# Altium PCB PCB1.PcbDoc
Units mm, origin at the board's own origin, x right, y up, seen from the top; angles counter-clockwise.
Board outline 68 x 20 mm, 2 copper layers (Top Layer, Bottom Layer); 9 components, 5 nets, 24 pads, 46 vias.
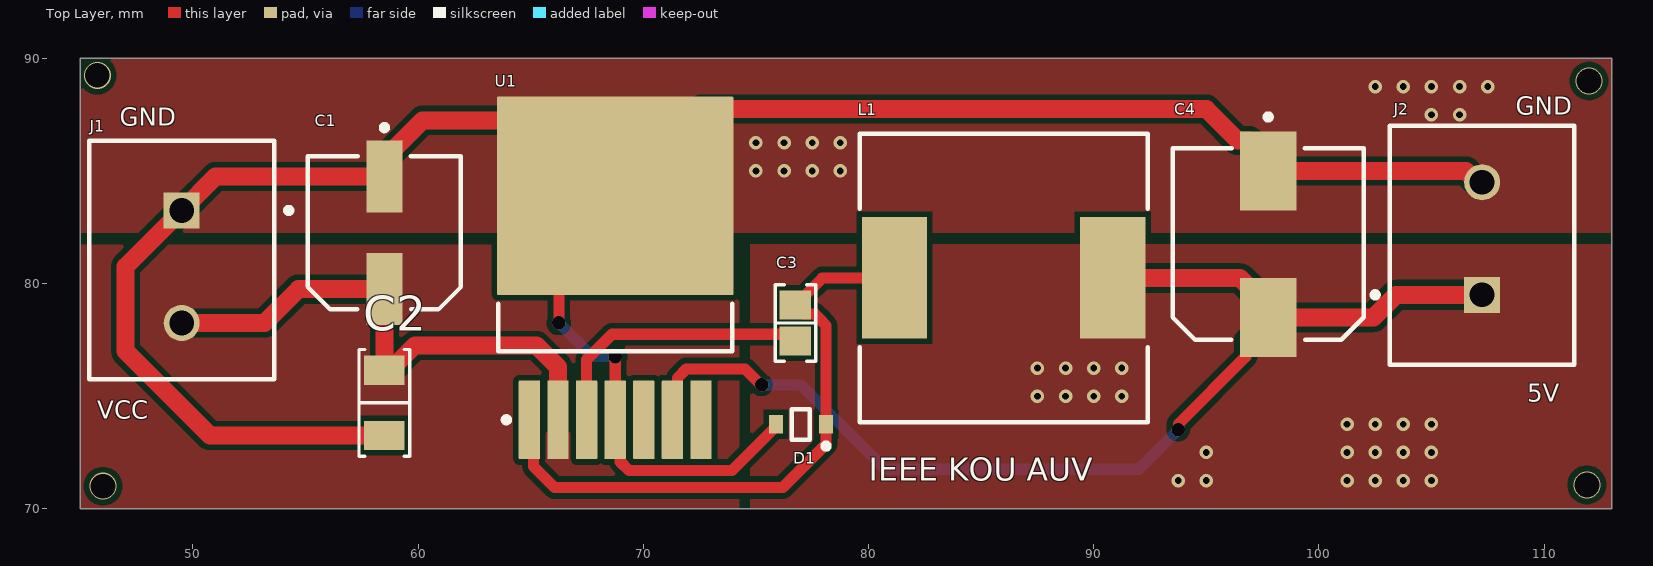
[diagram p0: Top Layer view]
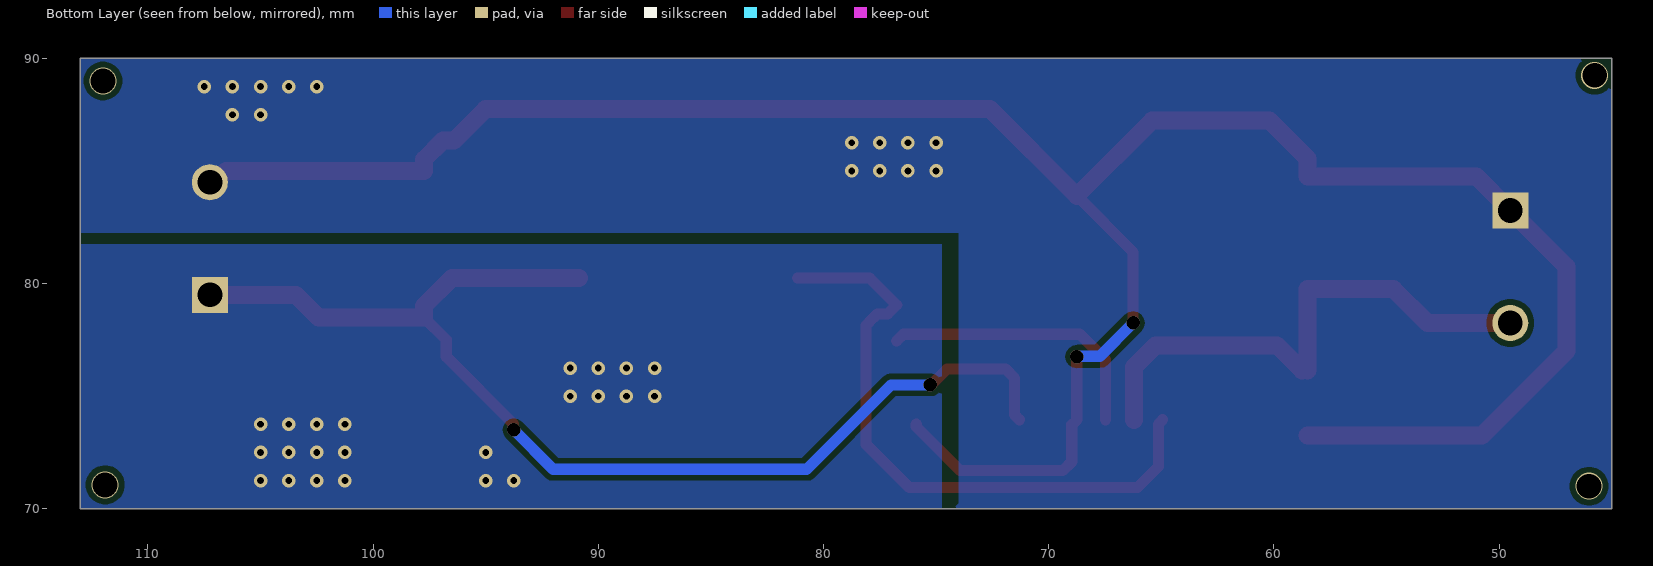
[diagram p1: Bottom Layer view, seen from below]
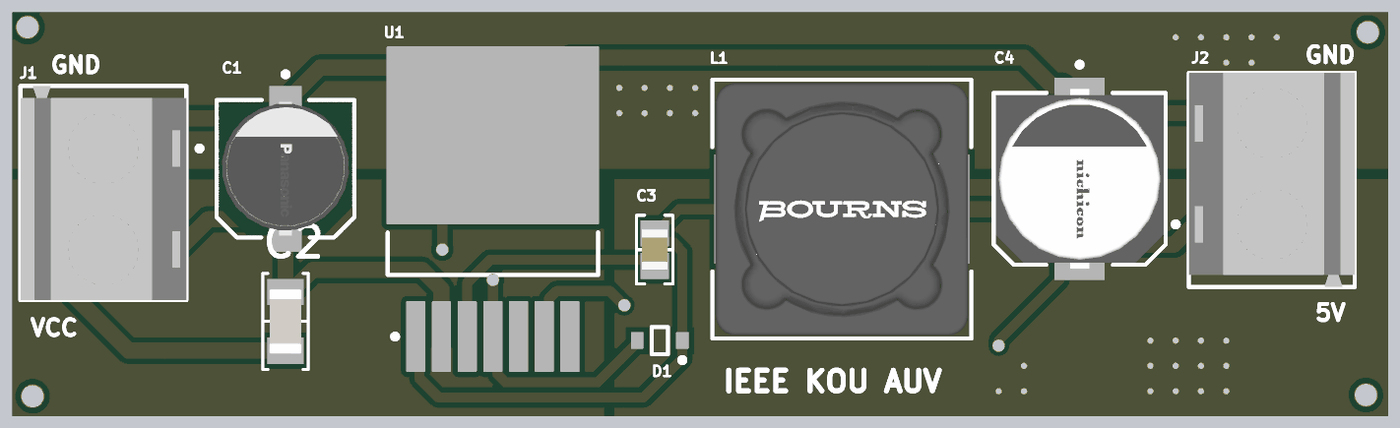
[diagram p2: 3D render of the assembled board from above, using the file's embedded part models]

## Layer stack, top to bottom
Top Solder: solder mask 0.0102, Solder Resist, Dk 3.5
Top Layer: signal copper 0.0356
Dielectric 1: dielectric 0.32, FR-4, Dk 4.8
Bottom Layer: signal copper 0.0356
Bottom Solder: solder mask 0.0102, Solder Resist, Dk 3.5

## Board outline
45,70 45,90 113,90 113,70

## Design rules (kind name [scope] priority, off if disabled: settings)
Clearance [All] p1: gap=0.254 ignorepadtopadclearanceinfootprint=FALSE except(0: Arc-Hole Track-Hole SMDPad-Hole THPad-Hole Via-Hole Fill-Hole Poly-Hole Region-Hole Text-Hole)
PolygonConnect [All] p1: connectstyle=Direct reliefconductorwidth=0.254 reliefentries=4 polygonreliefangle="90 Angle" airgapwidth=0.254
RoutingVias [All] p1: holewidth=0.6 width=0.6 viastyle="Through Hole" minholewidth=0.3 minwidth=0.3 maxholewidth=0.9 maxwidth=1.27
SolderMaskExpansion SolderMaskExpansion_2 [IsVia] p1: expansion=0.102 istentingtop=TRUE
Width [All] p1: maxlimit=2 minlimit=0.254 preferedwidth=0.5 minimp=50.000000 maximp=50.000000 favimp=50.000000
30 further rules are at their usual default settings.

## Classes and differential pairs
component class Sheet1: D1 J1 J2 L1 U1

## Components (designator, comment, footprint, x,y, rotation, side; value= is the part's Value field where it differs from the comment)
C1 "33 uF" FP-FK-D-MFG 58.5,82.25 r270 top value=47uF
C2 "0.47 µF" "CAP 1206_3216 - 0.8MM" 58.5,74.7 r90 top
C3 "10 nF" "CAP 0805_2012" 76.75,78.25 r90 top
C4 "220uF" FP-UWT1H101MNL1GS-MFG 97.75,81.75 r270 top
D1 "SK54" ONSC-SOD-323-2-477-02_V 77,73.75 r180 top
J1 "282836-2" TECO-282836-2_V 49.5,80.75 r270 top
J2 "282836-2" TECO-282836-2_V 107.25,82 r90 top
L1 "22 uH" FP-SRR1260-MFG 86,80.25 r0 top
U1 "LM2678S-5.0" KTW0007B_N 68.75,80.25 r90 top

## Footprints (in the part's own frame and the unit in brackets; to place one, negate y for a bottom-side part, rotate by r counter-clockwise, add the part's x,y. Pads: shape width x height; smd on the part's side, far side on the other; paste and mask are expansions set on the pad)
"CAP 0805_2012" [mm] "Chip Capacitor, 2-Leads, Body 2.00x1.20mm, IPC Medium Density"
  rect 1.3x1.4 smd: 1(-0.8,0) 2(0.8,0)
  silkscreen extent -1.7,-0.9 1.7,0.9, body extent -1,-0.64 1,0.64, height 1.26
"CAP 1206_3216 - 0.8MM" [mm] "Chip Capacitor, 2-Leads, Body 3.25x1.60mm, IPC Medium Density"
  rect 1.3x1.8 smd: 1(-1.45,0) 2(1.45,0)
  silkscreen extent -2.37,-1.12 2.37,1.12, body extent -1.6,-0.8 1.6,0.8, height 0.8
FP-FK-D-MFG [mm]
  rect 3.2x1.6 smd paste+0 mask+0: 1(-2.5,0) 2(2.5,0)
  silkscreen extent -4.8,-3.4 3.4,3.4, body extent -4.2,-3.5 4.2,3.5, height 0.25
FP-SRR1260-MFG [mm]
  rect 2.9x5.4 smd paste+0 mask+0: 1(-4.85,0) 2(4.85,0)
  silkscreen extent -6.4,-6.4 6.4,6.4, body extent -6.5,-6.5 6.5,6.5, height 0.25
FP-UWT1H101MNL1GS-MFG [mm]
  rect 3.5x2.5 smd paste+0 mask+0: 1(-3.25,0) 2(3.25,0)
  silkscreen extent -5.77,-4.25 4.25,4.25, body extent -5.25,-4.5 5.25,4.5, height 0.25
KTW0007B_N [mm] "DPAK, 7-Leads, Body 9.4x10.4mm, Pitch 1.27mm, IPC Medium Density"
  rrect11% 3.5x0.95 smd: 1(-6.3,3.81) 2(-6.3,2.54) 3(-6.3,1.27) 4(-6.3,0) 5(-6.3,-1.27) 6(-6.3,-2.54) 7(-6.3,-3.81)
  rrect1% 8.8x10.5 smd: 8(3.65,0)
  silkscreen extent -6.42,-5.2 -1.15,5.2, body extent -3.25,-5.2 6.15,5.2, height 4.65
ONSC-SOD-323-2-477-02_V [mm] "SOD, 2-Leads, Body 1.7x1.25mm"
  rect 0.63x0.83 smd: 1(-1.115,0) 2(1.115,0)
  silkscreen extent -1.24,-0.67 0.4,1.09, body extent -0.85,-0.63 0.85,0.63, height 1.06
TECO-282836-2_V [mm] "Female Header, Pitch 5mm, 1 x 2 Position, Height 10mm"
  rect 1.6x1.6 hole 1.1: 1(-2.5,0)
  round 1.6 hole 1.1: 2(2.5,0)
  silkscreen extent -5.6,-4.1 5,4.88, body extent -5.6,-4.1 5,4.1, height 10

## Part data
C1: library part CMP-05427-000002-1, "CAP ALUM 47UF 20% 35V SMD", Capacitance=47uF, Leakage Current=16.45uA, manufacturer=Panasonic, Manufacturer Part Number=EEE-FK1V470P, Package=FK-D, Ripple Current=240mA, Temperature="-55°C to +105°C", Temperature Range High=+105°C, Temperature Range Low=-55°C, Tolerance=20%, Voltage Rating=35V, Automotive=Yes, Automotive Grade="Grade 2", Category=Cap, componentlink2description=Datasheet, componentlink2url=https://industrial.panasonic.com/cdbs/www-data/pdf/RDE0000/ABA0000C1181.pdf, Device Class L1="Passive Components", Device Class L2=Capacitors, Device Class L3="Aluminum Electrolytic Capacitors", Digikey Description="CAP ALUM 47UF 20% 35V SMD", Dissipation Factor=12%, Esr=0.36Ω, Height=6.1mm, Lead Free=Yes, Life=2000Hours, Material=Aluminum, Mouser Description="Capacitor Aluminum Electrolytic 47uF 35 Volt 20% (6.3 X 5.8mm) Surface Mount 240mA 2000h 105C Automotive", Octopart=https://octopart.com/eeefk1v470p-panasonic-4642848, RoHS=TRUE
C2: library part CL31B474KBHNNNE, "CAP CER 0.47UF 50V X7R 1206", Device Package="1206 (3216 Metric)", manufacturer="Samsung Electro-Mechanics", Operating Temperature="-55°C ~ 125°C", Supplier Part Number 1=1276-1118-1-ND, Temperature Coefficient=X7R, Tolerance=±10%, Voltage - Rated=50V, Applications="General Purpose", Capacitance="0.47 µF", componentlink1description=Datasheet, componentlink1url=http://www.samsungsem.com/kr/support/product-search/mlcc/CL31B474KBHNNNE.jsp, componentlink2description="DigiKey Link", componentlink2url=https://www.digikey.com/en/products/detail/samsung-electro-mechanics/CL31B474KBHNNNE/3886776, lastupdated="3/17/2022 8:31:11 AM", Lifecycle Status=Active, Minimum Order=1, Mounting Type="Surface Mount, MLCC", Package / Case="1206 (3216 Metric)", packaging=TapeAndReel, Part Number=CL31B474KBHNNNE, Part Status=Active, partid=20844, price=0.02, series=CL, Size / Dimension="0.126\" L x 0.063\" W (3.20mm x 1.60mm)", Supplier 1=DigiKey, Thickness (Max)="0.071\" (1.80mm)"
C3: library part CL21B103KB6WPNC, "CAP CER 10000PF 50V X7R 0805", Capacitance="10000 pF", Device Package="0805 (2012 Metric)", manufacturer="Samsung Electro-Mechanics", Operating Temperature="-55°C ~ 125°C", Ratings=AEC-Q200, Supplier Part Number 1=1276-6565-1-ND, Temperature Coefficient=X7R, Tolerance=±10%, Voltage - Rated=50V, Applications=Automotive, componentlink1description=Datasheet, componentlink1url=http://www.samsungsem.com/kr/support/product-search/mlcc/CL21B103KB6WPNC.jsp, componentlink2description="DigiKey Link", componentlink2url=https://www.digikey.com/en/products/detail/samsung-electro-mechanics/CL21B103KB6WPNC/5961049, Features="Open Mode", lastupdated="3/17/2022 8:29:38 AM", Lifecycle Status=Active, Minimum Order=1, Mounting Type="Surface Mount, MLCC", Package / Case="0805 (2012 Metric)", packaging=TapeAndReel, Part Number=CL21B103KB6WPNC, Part Status=Active, partid=3767, price=0.03, series=CL, Size / Dimension="0.079\" L x 0.049\" W (2.00mm x 1.25mm)", Supplier 1=DigiKey, Thickness (Max)="0.028\" (0.70mm)"
C4: library part CMP-2000-07373-2, "CAP ALUM 100UF 20% 50V SMD", Capacitance=100uF, Case/Package=Radial, Dielectric Material=Aluminium, Leakage Current=3uA, Max Operating Temperature=105°C, Min Operating Temperature=-55°C, Package Quantity=500, Ripple Current=140mA, Tolerance=20%, Voltage=50V, Construction=Cylindrical, Diameter=8mm, Dissipation Factor=0.14%, Height=10mm, Height - Seated (Max)=0.413inch, Lead Free="Lead Free", Length=10mm, Life (Hours)=1000Hour, Mount="Surface Mount", Number of Pins=2, packaging="Tape and Reel", Radiation Hardening=No, REACH SVHC="No SVHC", Ripple Current (AC)=140mA, RoHS Compliant=Yes, series=WT, Termination=SMD/SMT, Voltage Rating=50V, Voltage Rating (DC)=50V
D1: library part CMP-1055-00462-1, "Schottky Barrier Diode, 2-Pin SOD-323, Pb-Free, Tape and Reel", manufacturer="On Semiconductor", PartNumber=BAT54HT1G, componentlink1description="Manufacturer URL", componentlink1url=http://www.onsemi.com/, componentlink2description=Datasheet, componentlink2url=http://www.onsemi.cn/pub_link/Collateral/BAT54HT1-D.PDF, ComponentLink3Description="Package Specification", ComponentLink3URL=http://www.onsemi.com/pub_link/Collateral/477-02.PDF.1, Configuration=Single, DatasheetVersion="Rev. 6", IFSM Max (A)=0.6, Mounting Technology="Surface Mount", PackageDescription="2-Pin SOD, Body 1.7 x 1.25 mm", PackageReference=SOD-323-2-477-02, PackageVersion="Rev. H, 03/2007", Packing="Tape and Reel", RoHS=TRUE, trr Max (ns)=5
J1 J2: library part CMP-1684-00017-1, "Female Header, Pitch 5 mm, 1 x 2 Position, Height 10 mm, Tail Length 3.5 mm, Rohs, Bulk", Color=Green, Current=13.5A, manufacturer="TE Connectivity", Package Description="Female Header, Pitch 5 mm, 1 x 2 Position, Height 10 mm, Tail Length 3.5 mm", Package Reference=THD, Standard Package=300, Voltage=300V, 3D Model=282836-2.pdf, Category=Connectors,Interconnects, Clamp Material - Plating=Brass-NickelPlated, Contact Material - Plating=Brass-TinPlated, Datasheet URL=http://www.te.com.cn/commerce/DocumentDelivery/DDEController?Action=showdoc&DocId=Catalog+Section%7F1308389_EUROSTYLE_TERMINAL_BLOCKS%7F0607%7Fpdf%7FEnglish%7FENG_CS_1308389_EUROSTYLE_TERMINAL_BLOCKS_0607.pdf%7F282836-2, Dynamic Catalog=BuchananSeries, Family=TerminalBlocks-WiretoBoard, Featured Product=EurostyleTerminalBlockConnectors, Features=Interlocking(Side), Housing Material=Polyamide(PA66),Nylon6/6, Manufacturer URL=http://www.te.com, Mating Orientation=HorizontalwithBoard, Mounting Type=ThroughHole, Number of Levels=1, Other Names="5ULV-02B / A98076", packaging=Bulk, Pitch="0.197\"(5.00mm)", Positions Per Level=2, Product Training Modules=Wire-to-BoardEurostyleTerminalBlocks, RoHS Information=282836-2StatementofCompliance, Screw Material - Plating=Brass-NickelPlated, Screw Thread=M3, series=Buchanan, Torque - Screw=0.68Nm(6Lb-In), Wire Gauge=16-30AWG, Wire Termination=Screw-RisingCageClamp
L1: library part CMP-2000-07146-2, "FIXED IND 15UH 5A 27 MOHM SMD", Case/Package=1260, Current Rating=5A, DC Resistance (DCR)=27mR, Frequency=17.6MHz, Inductance=15uH, Inductance Tolerance=20%, Max Operating Temperature=125°C, Min Operating Temperature=-40°C, Package Quantity=600, Resistance=27MR, Resistor Type=Wirewound, Saturation Current=4.6A, Test Frequency=100kHz, Core Material=Ferrite, DC Current=5A, Depth=12.8mm, Height=6mm, Height - Seated (Max)=0.256inch, Length=12.5mm, Material=Steel, Max DC Current=5A, Military Standard=Not, Mount="Surface Mount", Number of Pins=2, packaging="Tape and Reel", Q Factor=25, REACH SVHC="No SVHC", RMS Current (Irms)=5A, RoHS Compliant=Yes, Sample Rate (Hz)=100kHz, Self Resonant Frequency=17.6MHz, series=SRR1260, Shielding=Shielded, Termination=SMD/SMT, Tolerance=20%, Width=12.5mm
U1: library part CMP-0069-00190-3, "SIMPLE SWITCHER® High Efficiency 5A Step-Down Voltage Regulator, 7-pin TO-263", manufacturer="Texas Instruments", PackageTopMarking=NSUZXYTTE#*LM2678*S-5.0, PowerWise=N, Code_JEDEC=MO-169-AC, componentlink1description="Datasheet URL", componentlink1url=http://www.ti.com/general/docs/lit/getliterature.tsp?genericPartNumber=LM2678&fileType=pdf, CompType=Switcher, PackageDescription="TO-263, Molded, .400 x .390 x .180in Body, 7 Lead, .050in Pitch, Surface Mount", PackageReference=KTW0007B, PinCount=7, RoHS=N

## Via types
v1: diameter 0.6, hole 0.3, Top Layer to Bottom Layer, tented both sides, 38 vias
v2: diameter 1.2, hole 1.1, Top Layer to Bottom Layer, tented both sides, 4 vias
v3: diameter 0.6, hole 0.6, Top Layer to Bottom Layer, tented both sides, 4 vias

## Nets (pads, with @x,y where several pads share a name; then routed paths per layer and width w, separated by ;. In a path a pad name is that pad's centre, name@x,y a point inside that pad or via, vN(x,y) a via of type N, cw(c..) or ccw(c..) an arc to the next point about the centre after c; other vN are vias at no path point)
+5: C4.2 J2.1 L1.2 U1.6 | length 51.4
  Top Layer w0.5: U1.6 71.515,74.175 71.515,75.812 71.907,76.204 74.519,76.204 75.223,75.5 v3(75.25,75.5) ; v3(93.75,73.5) 93.769,73.519 93.769,73.769 96.75,76.75 96.75,77.5 C4.2
  Top Layer w0.8: L1.2 96.5,80.25 97.75,79 C4.2 102.425,78.5 103.425,79.5 J2.1
  Bottom Layer w0.5: v3(75.25,75.5) 77,75.5 80.75,71.75 92,71.75 v3(93.75,73.5)
  other v1: 93.75,71.25 95,71.25 101.25,71.25 102.5,71.25 103.75,71.25 105,71.25 95,72.5 101.25,72.5 102.5,72.5 103.75,72.5 105,72.5 101.25,73.75 102.5,73.75 103.75,73.75 105,73.75 87.5,75 88.75,75 90,75 91.25,75 87.5,76.25 88.75,76.25 90,76.25 91.25,76.25
GND: C1.1 C2.1 C4.1 D1.2 J1.1 J2.2 U1.4 U1.8 | length 107.4
  Top Layer w0.5: v3(66.25,78.25) 66.25,81.4 U1.8 ; v3(68.75,76.75) U1.4 68.975,73.725 68.975,72.088 69.367,71.696 73.931,71.696 75.885,73.65 D1.2
  Top Layer w0.8: C2.1 50.75,73.25 47,77 47,80.75 J1.1 51,84.75 C1.1 58.5,85.55 60.2,87.25 65.4,87.25 U1.8 72.6,87.75 95,87.75 96.4,86.35 96.9,86.35 97.75,85.5 C4.1 106.534,85 107.034,84.5 J2.2
  Bottom Layer w0.5: v3(66.25,78.25) 67.731,76.769 68.731,76.769 v3(68.75,76.75)
  other v1: 75,85 76.25,85 77.5,85 78.75,85 75,86.25 76.25,86.25 77.5,86.25 78.75,86.25 105,87.5 106.25,87.5 102.5,88.75 103.75,88.75 105,88.75 106.25,88.75 107.5,88.75
NetC3_1: C3.1 U1.3 | length 12.5
  Top Layer w0.5: U1.3 67.48,76.617 68.613,77.75 76.45,77.75 C3.1
NetC3_2: C3.2 D1.1 L1.1 U1.1 | length 28.2
  Top Layer w0.5: U1.1 65.123,73.767 65.123,71.877 66.058,70.942 76.192,70.942 78.115,72.865 D1.1 78.115,78.135 77.954,78.296 77.954,78.309 77.613,78.65 77.15,78.65 C3.2 77.95,80.25 L1.1
VCC: C1.2 C2.2 J1.2 U1.2 | length 24.1
  Top Layer w0.5: C2.2 C2.2@58.75,76.15
  Top Layer w0.8: J1.2 53.181,78.25 54.681,79.75 C1.2 C2.2 ; C2.2@58.75,76.15 59.85,77.25 65.25,77.25 66.21,76.29 U1.2
pads on no net: U1.5 U1.7
copper on no net:
  other v2: 46,71 111.903,71.06 112,89 45.75,89.25

## Polygon pours and split planes (outlines as drawn)
VCC on Top Layer "VCC_L01_P000" (solid, pour order 0): 45,81.75 45.03,81.72 74.254,81.72 74.254,70.004 74.25,70 45,70
GND on Top Layer "GND_L01_P003" (solid, pour order 3): 45,82.25 45,90 113,90 113,82.25
+5 on Top Layer "+5_L01_P001" (solid, pour order 1): 74.75,81.75 113,81.75 113,70 74.75,70
GND on Bottom Layer "GND_L02_P004" (solid, pour order 4): 45,90 45,70 74.25,70 74,70.25 74,82.25 113,82.25 113,90
+5 on Bottom Layer "+5_L02_P002" (solid, pour order 2): 74.75,81.75 74.75,70 113,70 113,81.75

## Silkscreen, mask and mechanical layers (free items; w line width, h text height)
Top Overlay:
  text "GND" at 108.754,87.504 h0.8
  text "GND" at 46.754,87.004 h0.8
  text "5V" at 109.254,74.754 h0.8
  text "VCC" at 45.754,74.004 h0.8
  text "IEEE KOU AUV" at 80.004,71.254 h1.02
Mechanical 1:
  the board outline again, w0.254